# Altium PCB Project_PCB.PcbDoc
Units mm, origin at the board's own origin, x right, y up, seen from the top; angles counter-clockwise.
Board outline 100 x 100 mm, 2 copper layers (Top Layer, Bottom Layer); 40 components, 53 nets, 183 pads, 4 vias.
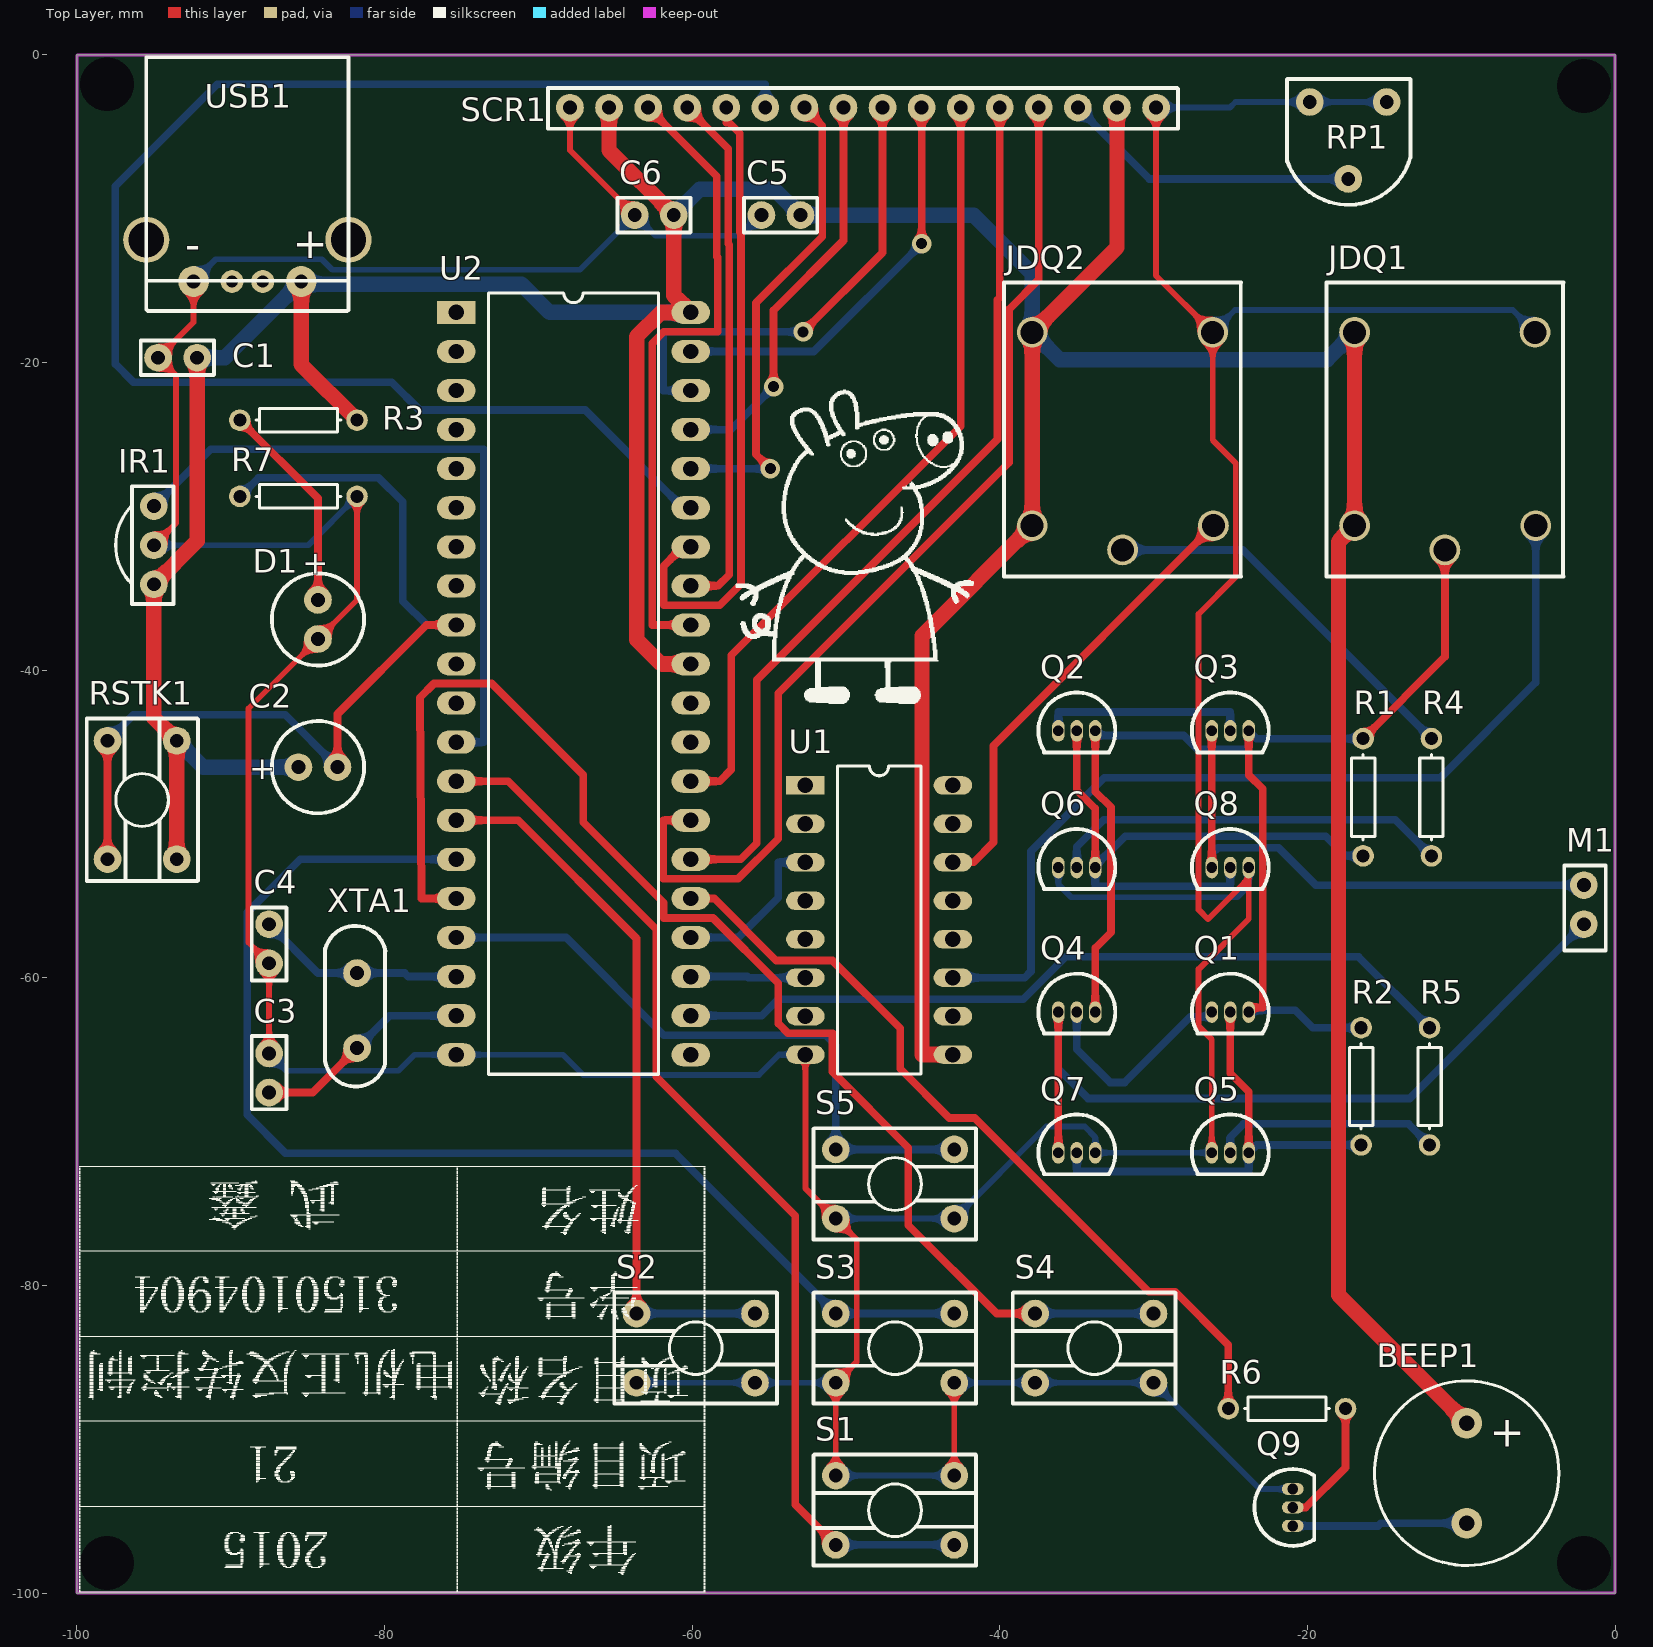
[diagram p0: Top Layer view]
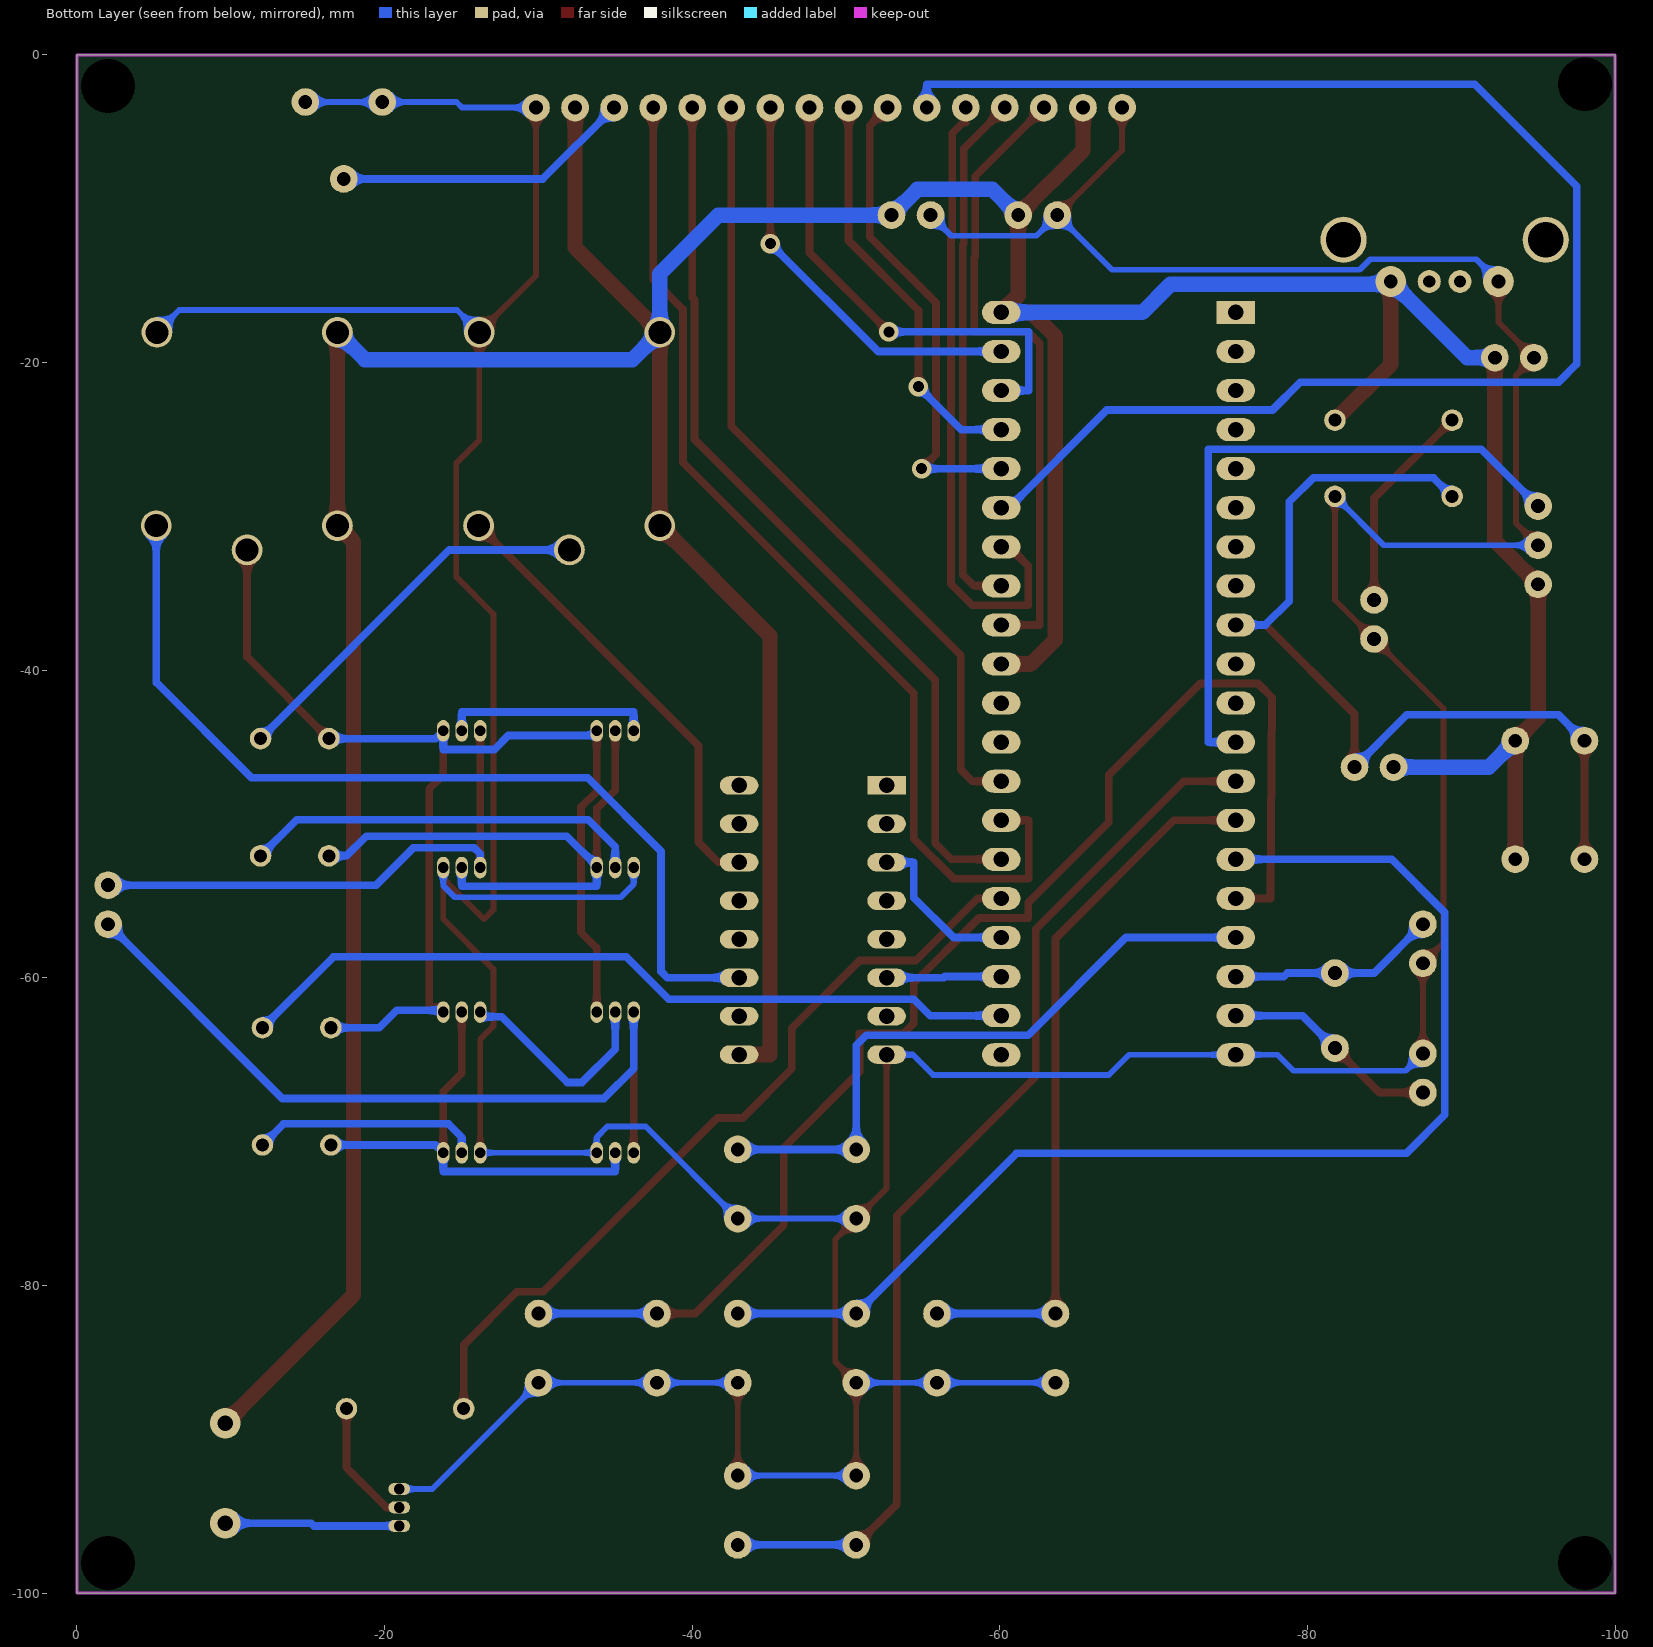
[diagram p1: Bottom Layer view, seen from below]

## Layer stack, top to bottom
Top Solder: solder mask 0.0102, Solder Resist, Dk 3.5
Top Layer: signal copper 0.0356
Dielectric 1: dielectric 0.32, FR-4, Dk 4.8
Bottom Layer: signal copper 0.0356
Bottom Solder: solder mask 0.0102, Solder Resist, Dk 3.5

## Board outline
-100,-100 0,-100 0,0 -100,0

## Design rules (kind name [scope] priority, off if disabled: settings)
Clearance [All] p1: gap=0.254
PolygonConnect [All] p1: connectstyle=Relief reliefconductorwidth=0.254 reliefentries=4 polygonreliefangle="90 Angle" airgapwidth=0.254
RoutingVias [All] p1: holewidth=0.711 width=1.27 viastyle="Through Hole" minholewidth=0.711 minwidth=1.27 maxholewidth=0.711 maxwidth=1.27
SolderMaskExpansion [All] p1: expansion=0.102
Width Width_gnd [InNet('GND')] p1: maxlimit=0.381 minlimit=0.381 preferedwidth=0.381
Width Width_vcc [InNet('VCC')] p2: maxlimit=1 minlimit=1 preferedwidth=1
Width [All] p3: maxlimit=0.5 minlimit=0.5 preferedwidth=0.5
30 further rules are at their usual default settings.

## Components (designator, comment, footprint, x,y, rotation, side; value= is the part's Value field where it differs from the comment)
BEEP1 "BEEP" BEEP -9.652,-92.202 r0 top
C1 "104" CAP -93.472,-19.685 r0 top
C2 "10UF" CAP-ELEC -84.328,-46.355 r0 top
C3 "30pF" CAP -87.503,-66.167 r270 top
C4 "30pF" CAP -87.503,-57.805 r90 top
C5 "104" CAP -54.249,-10.414 r0 top
C6 "104" CAP -62.484,-10.414 r0 top
D1 "LED" LED -84.378,-36.703 r270 top
IR1 "1x3" RAY -94.996,-34.417 r90 top
JDQ1 "3-2" RELAY -18.765,-32.004 r90 top
JDQ2 "3-2" RELAY -39.72,-32.004 r90 top
M1 "MOTOR" MOTOR -3.18,-52.827 r270 top
Q1 "9013" PINS-3 -25.019,-62.23 r0 top
Q2 "9013" PINS-3 -34.995,-43.942 r0 top
Q3 "9013" PINS-3 -25.019,-43.942 r0 top
Q4 "9013" PINS-3 -34.995,-62.23 r0 top
Q5 "9013" PINS-3 -25.019,-71.374 r0 top
Q6 "9013" PINS-3 -34.995,-52.832 r0 top
Q7 "9012" PINS-3 -34.995,-71.374 r0 top
Q8 "9012" PINS-3 -25.019,-52.832 r0 top
Q9 "9012" PINS-3 -20.955,-94.431 r90 top
R1 "1K" RES -17.018,-45.72 r270 top
R2 "1K" RES -17.145,-64.516 r270 top
R3 "1K" RES -83.058,-23.114 r180 top
R4 "1K" RES -12.573,-45.72 r270 top
R5 "1K" RES -12.7,-64.516 r270 top
R6 "100" RES -23.876,-88.646 r0 top
R7 "10K" RES -83.058,-28.067 r180 top
RP1 "5K" RES-ADJ -17.399,-5.588 r180 top
RSTK1 "按键" KEY-4 -95.758,-48.387 r90 top
S1 "按键" KEY-4 -46.863,-94.615 r180 top
S2 "按键" KEY-4 -59.817,-84.074 r180 top
S3 "按键" KEY-4 -46.863,-84.074 r180 top
S4 "按键" KEY-4 -33.909,-84.074 r180 top
S5 "按键" KEY-4 -46.863,-73.406 r180 top
SCR1 "LCD" LCD -67.945,-3.429 r180 top
U1 "ULN2003A" DIP16 -52.643,-47.491 r0 top
U2 "ST89C52" STC89C52 -67.437,-40.64 r0 top
USB1 "1x4" USB -95.508,-16.403 r0 top
XTA1 "12MHz" CRYSTAL -81.788,-64.57 r90 top

## Footprints (in the part's own frame and the unit in brackets; to place one, negate y for a bottom-side part, rotate by r counter-clockwise, add the part's x,y. Pads: shape width x height; smd on the part's side, far side on the other; paste and mask are expansions set on the pad)
BEEP [mm]
  round 2 hole 1: 1(0,3.25) 2(0,-3.25)
  silkscreen extent -6,-6 6,6
CAP [mm]
  round 1.8 hole 0.9: 1(-1.25,0) 2(1.29,0)
  silkscreen extent -2.37,-1.13 2.38,1.13
CAP-ELEC [mm]
  round 1.8 hole 0.9: 1(-1.27,0.05) 2(1.27,0.05)
  silkscreen extent -3,-2.95 3,3.05
CRYSTAL [mm]
  round 1.8 hole 0.9: 1(0,0) 2(4.88,0)
  silkscreen extent -2.5,-1.84 7.95,2.07
DIP16 [mm]
  rect 2.5x1.2 hole 1: 1(0,0)
  oval 2.5x1.2 hole 1: 2(0,-2.5) 3(0,-5) 4(0,-7.5) 5(0,-10) 6(0,-12.5) 7(0,-15) 8(0,-17.5) 9(9.59,-17.5) 10(9.59,-15) 11(9.59,-12.5) 12(9.59,-10) 13(9.59,-7.5) 14(9.59,-5) 15(9.59,-2.5) 16(9.59,0)
  silkscreen extent 2.09,-18.75 7.51,1.25
KEY-4 [mm]
  round 1.8 hole 0.9: 1(-3.9,-2.25) 1(3.8,-2.25) 2(-3.9,2.25) 2(3.8,2.25)
  silkscreen extent -5.33,-3.62 5.25,3.6
LCD [mm]
  round 1.8 hole 0.9: 1(-38.1,0) 2(-35.56,0) 3(-33.02,0) 4(-30.48,0) 5(-27.94,0) 6(-25.4,0) 7(-22.86,0) 8(-20.32,0) 9(-17.78,0) 10(-15.24,0) 11(-12.7,0) 12(-10.16,0) 13(-7.62,0) 14(-5.08,0) 15(-2.54,0) 16(0,0)
  silkscreen extent -39.52,-1.27 1.42,1.38
LED [mm]
  round 1.8 hole 0.9: 1(-1.27,0.05) 2(1.27,0.05)
  silkscreen extent -3,-2.95 3,3.05
MOTOR [mm]
  round 1.8 hole 0.9: 1(1.148,1.148) 2(3.688,1.148)
  silkscreen extent -0.13,-0.13 5.39,2.57
PINS-3 [mm]
  oval 0.8x1.4 hole 0.7: 1(-1.2,0) 2(0,0) 3(1.2,0)
  silkscreen extent -2.5,-1.4 2.5,2.5
RAY [mm]
  round 1.8 hole 0.9: 1(0,0) 2(2.54,0) 3(5.08,0)
  silkscreen extent -1.27,-1.27 6.37,2.48
RELAY [mm]
  round 2 hole 1.5: 1(13.97,-13.558) 2(13.97,-1.825) 3(1.397,-1.825) 4(-0.18,-7.7) 5(1.397,-13.605)
  silkscreen extent -1.91,-15.4 17.19,0
RES [mm]
  round 1.4 hole 0.85: 1(-1.27,0.635) 2(6.35,0.635)
  silkscreen extent -0.23,-0.13 5.31,1.4
RES-ADJ [mm]
  round 1.8 hole 0.9: 1(-2.55,-2.525) 2(-0.05,2.475) 3(2.45,-2.525)
  silkscreen extent -4.1,-4.02 3.93,4.15
STC89C52 [mm]
  rect 2.5x1.5 hole 1: 1(-7.9,23.9)
  oval 2.5x1.5 hole 1: 2(-7.9,21.36) 3(-7.9,18.82) 4(-7.9,16.28) 5(-7.9,13.74) 6(-7.9,11.2) 7(-7.9,8.66) 8(-7.9,6.12) 9(-7.9,3.58) 10(-7.9,1.04) 11(-7.9,-1.5) 12(-7.9,-4.04) 13(-7.9,-6.58) 14(-7.9,-9.12) 15(-7.9,-11.66) 16(-7.9,-14.2) 17(-7.9,-16.74) 18(-7.9,-19.28) 19(-7.9,-21.82) 20(-7.9,-24.36) 21(7.34,-24.36) 22(7.34,-21.82) 23(7.34,-19.28) 24(7.34,-16.74) 25(7.34,-14.2) 26(7.34,-11.66) 27(7.34,-9.12) 28(7.34,-6.58) 29(7.34,-4.04) 30(7.34,-1.5) 31(7.34,1.04) 32(7.34,3.58) 33(7.34,6.12) 34(7.34,8.66) 35(7.34,11.2) 36(7.34,13.74) 37(7.34,16.28) 38(7.34,18.82) 39(7.34,21.36) 40(7.34,23.9)
  silkscreen extent -5.82,-25.63 5.26,25.17
USB [mm]
  round 2 hole 0.9: 1(10.092,1.671) 4(3.092,1.671)
  round 1.5 hole 0.8: 2(7.592,1.671) 3(5.592,1.671)
  round 3 hole 2.3: 5(13.162,4.381) 6(0.022,4.381)
  silkscreen extent 0.02,-0.25 13.16,16.25

## Part data
BEEP1: library part 蜂鸣器
C1 C3 C4 C5 C6: library part 瓷片电容
C2: library part 电解电容
JDQ1 JDQ2: library part RELAY
Q1 Q2 Q3 Q4 Q5 Q6: library part NPN
Q7 Q8 Q9: library part PNP
R1 R2 R3 R4 R5 R6 R7: library part 电阻
RP1: library part 可调电阻
U2: library part STC89C52
XTA1: library part 晶振

## Free pads (board coordinates)
  round 1.524 hole 3.5: 0(-98.044,-98.044) 0(-98.044,-1.905) 0(-2.032,-98.044) 0(-2.032,-2.032)

## Via types
v1: diameter 1.27, hole 0.711, Top Layer to Bottom Layer, 4 vias

## Nets (pads, with @x,y where several pads share a name; then routed paths per layer and width w, separated by ;. In a path a pad name is that pad's centre, name@x,y a point inside that pad or via, vN(x,y) a via of type N, cw(c..) or ccw(c..) an arc to the next point about the centre after c; other vN are vias at no path point)
DIR: JDQ2.4 R4.1 | length 25.2
  Bottom Layer w0.5: JDQ2.4 -24.204,-32.184 R4.1
EGY: JDQ1.4 Q1.3 Q2.3 Q3.3 Q4.3 R1.1 R2.1 | length 80.6
  Top Layer w0.5: Q4.3 -33.795,-58.064 -32.766,-57.036 -32.766,-48.92 -33.795,-47.892 Q2.3 ; Q1.3 -23.819,-61.925 -22.911,-61.925 -22.911,-47.72 -23.819,-46.812 Q3.3 ; R1.1 -11.065,-39.132 JDQ1.4
  Bottom Layer w0.5: Q2.3 -33.795,-44.247 -28.042,-44.247 -27.127,-45.161 -23.819,-45.161 Q3.3 -23.311,-44.45 R1.1 ; Q1.3 -23.819,-62.116 -20.79,-62.116 -19.66,-63.246 R2.1
GND: C1.1 C3.1 C4.1 C5.1 C6.1 D1.2 IR1.2 JDQ1.1 JDQ2.1 Q5.1 Q6.1 Q7.3 Q8.3 Q9.3 R7.1 RP1.1 RP1.3 S1.1 S2.2 S3.2 S4.2 S5.2 SCR1.1 SCR1.16 U1.8 U2.20 USB1.4 | length 401.2
  Top Layer w0.381: IR1.2 -93.548,-30.429 -93.548,-20.859 C1.1 -92.416,-17.379 USB1.4 ; C3.1 C4.1 -88.849,-57.709 -88.849,-42.494 D1.2 -81.788,-35.433 R7.1 ; SCR1.16 -67.945,-6.203 C6.1 ; U1.8 -52.643,-73.676 -50.663,-75.656 -49.302,-77.017 -49.302,-84.963 -50.663,-86.324 S1.1@-50.663,-92.365 ; S1.1@-42.963,-92.365 S3.2@-42.963,-86.324 ; SCR1.1 -29.845,-14.351 JDQ2.1 -26.162,-25.045 -24.664,-26.543 -24.664,-33.934 -27.077,-36.347 -27.077,-55.575 -26.467,-56.185 -23.819,-53.537 ; Q5.1 -26.219,-64.002 -27.077,-63.144 -27.077,-59.436 -23.819,-56.178 -23.819,-53.537 ; Q8.3 -23.819,-53.537
  Bottom Layer w0.381: IR1.2 -84.963,-31.877 R7.1 ; USB1.4 -90.968,-13.284 -84.074,-13.284 -83.392,-13.967 -67.287,-13.967 C6.1 -62.388,-11.76 -56.845,-11.76 C5.1 ; C3.1 -86.38,-66.04 -79.096,-66.04 -78.056,-65 U2.20 -68.401,-65 -67.082,-66.319 -55.667,-66.319 -54.339,-64.991 U1.8 ; S2.2@-63.617,-86.324 -55.917,-86.324 S3.2@-50.663,-86.324 ; S1.1@-50.663,-92.365 S1.1@-42.963,-92.365 ; S5.2@-50.663,-75.656 -42.963,-75.656 -36.979,-69.672 -34.481,-69.672 -33.795,-70.358 Q7.3 Q5.1 ; S3.2@-42.963,-86.324 -37.709,-86.324 -30.009,-86.324 -23.102,-93.231 Q9.3 ; Q6.1 -36.195,-53.924 -35.357,-54.762 -24.562,-54.762 -23.819,-54.019 Q8.3 ; SCR1.1 -25.045,-3.429 -24.679,-3.063 RP1.3 RP1.1 ; JDQ2.1 -24.714,-16.586 -6.655,-16.586 JDQ1.1
NetBEEP1_2: BEEP1.2 Q9.1 | length 11.4
  Bottom Layer w0.5: Q9.1 -15.418,-95.631 -15.239,-95.452 BEEP1.2
NetD1_1: D1.1 R3.2 | length 13.8
  Top Layer w0.5: R3.2 -84.328,-28.829 D1.1
NetM1_1: M1.1 Q3.1 Q8.1 | length 35.1
  Top Layer w0.5: Q8.1 Q3.1
  Bottom Layer w0.5: Q8.1 -26.219,-51.943 -25.817,-51.541 -21.881,-51.541 -19.447,-53.975 M1.1
NetM1_2: M1.2 Q4.1 Q7.1 | length 52.5
  Top Layer w0.5: Q7.1 Q4.1
  Bottom Layer w0.5: Q4.1 -36.195,-65.913 -34.265,-67.843 -13.36,-67.843 M1.2
NetQ1_2: Q1.2 Q5.3 Q7.2 R2.2 | length 30.8
  Top Layer w0.5: Q1.2 -25.019,-66.212 -23.819,-67.412 Q5.3
  Bottom Layer w0.5: Q7.2 -34.995,-72.593 -23.819,-72.593 Q5.3 -23.311,-70.866 R2.2
NetQ1_3: Q1.1 Q4.2 | length 14.2
  Bottom Layer w0.5: Q4.2 -34.995,-64.643 -32.836,-66.802 -31.877,-66.802 -27.61,-62.535 -26.219,-62.535 Q1.1
NetQ2_2: Q2.2 Q6.3 Q8.2 R1.2 | length 39.5
  Top Layer w0.5: Q2.2 -34.995,-47.797 -33.795,-48.997 Q6.3
  Bottom Layer w0.5: Q8.2 -25.019,-54.051 -33.795,-54.051 Q6.3 -33.795,-52.73 -31.852,-50.787 -18.809,-50.787 -17.526,-52.07 R1.2
NetQ2_3: Q2.1 Q3.2 | length 13.6
  Bottom Layer w0.5: Q2.1 -36.195,-42.723 -25.019,-42.723 Q3.2
NetQ5_2: Q5.2 R5.2 | length 14.9
  Bottom Layer w0.5: Q5.2 -25.019,-70.358 -24.155,-69.494 -13.437,-69.494 R5.2
NetQ6_2: Q6.2 R4.2 | length 26.1
  Bottom Layer w0.5: Q6.2 -34.995,-51.486 -33.233,-49.724 -14.284,-49.724 R4.2
NetQ9_2: Q9.2 R6.2 | length 8.3
  Top Layer w0.5: Q9.2 -20.117,-94.431 -17.526,-91.84 R6.2
NetRP1_2: RP1.2 SCR1.3 | length 19.5
  Bottom Layer w0.5: SCR1.3 -30.291,-8.063 RP1.2
P00: SCR1.7 U2.39 | length 26.8
  Top Layer w0.5: v1(-45.085,-12.268) SCR1.7
  Bottom Layer w0.5: U2.39 -52.097,-19.28 v1(-45.085,-12.268)
P01: SCR1.8 U2.38 | length 31.4
  Top Layer w0.5: v1(-52.781,-18.009) -47.625,-12.852 SCR1.8
  Bottom Layer w0.5: U2.38 -61.875,-21.82 -61.875,-18.009 v1(-52.781,-18.009)
P02: SCR1.9 U2.37 | length 26.6
  Top Layer w0.5: v1(-54.71,-21.565) -54.71,-16.61 -50.165,-12.065 SCR1.9
  Bottom Layer w0.5: U2.37 -57.506,-24.36 v1(-54.71,-21.565)
P03: SCR1.10 U2.36 | length 31.3
  Top Layer w0.5: v1(-54.915,-26.9) -55.855,-25.96 -55.855,-16.129 -51.537,-11.811 -51.537,-4.597 SCR1.10
  Bottom Layer w0.5: U2.36 v1(-54.915,-26.9)
P04: SCR1.11 U2.35 | length 99.4
  Bottom Layer w0.5: U2.35 -60.605,-29.44 -66.956,-23.089 -77.724,-23.089 -79.528,-21.285 -96.317,-21.285 -97.511,-20.091 -97.511,-8.534 -90.881,-1.905 -55.245,-1.905 SCR1.11
P05: SCR1.12 U2.34 | length 41.9
  Top Layer w0.5: U2.34 -60.605,-31.98 -61.851,-33.227 -61.851,-35.774 -58.217,-35.774 -56.82,-34.377 -56.82,-11.608 -56.903,-11.525 -56.903,-5.099 -57.582,-4.42 -57.785,-4.42 SCR1.12
P06: SCR1.13 U2.33 | length 34.3
  Top Layer w0.5: SCR1.13 -57.657,-6.097 -57.657,-12.286 -57.589,-12.354 -57.589,-33.79 -58.319,-34.52 U2.33
P07: SCR1.14 U2.32 | length 41.8
  Top Layer w0.5: SCR1.14 -58.411,-7.883 -58.411,-13.108 -58.343,-13.176 -58.343,-18.009 -61.851,-18.009 -62.605,-18.763 -62.605,-37.06 U2.32
P10: U2.1
P11: U2.2
P12: U2.3
P13: U2.4
P14: U2.5
P15: U2.6
P16: U2.7
P17: U2.8
P20: U2.21
P21: R5.1 U2.22 | length 51.5
  Bottom Layer w0.5: U2.22 -55.47,-62.46 -54.397,-61.387 -38.476,-61.387 -35.713,-58.623 -16.688,-58.623 R5.1
P22: U1.6 U2.23 | length 7.5
  Bottom Layer w0.5: U2.23 -56.414,-59.92 -56.343,-59.991 U1.6
P23: U1.3 U2.24 | length 10.8
  Bottom Layer w0.5: U2.24 -56.998,-57.38 -54.407,-54.789 -54.407,-52.491 U1.3
P24: R6.1 U2.25 | length 52.7
  Top Layer w0.5: U2.25 -58.571,-54.84 -54.534,-58.877 -50.876,-58.877 -46.482,-63.271 -46.482,-65.913 -43.282,-69.113 -41.631,-69.113 -30.328,-80.416 -28.601,-80.416 -25.146,-83.871 R6.1
P25: SCR1.5 U2.26 | length 59.1
  Top Layer w0.5: U2.26 -56.845,-52.3 -55.803,-51.257 -55.803,-40.639 -40.153,-24.989 -40.153,-15.924 -40.005,-15.776 SCR1.5
P26: SCR1.4 U2.27 | length 68.7
  Top Layer w0.5: U2.27 -61.875,-49.76 -61.875,-53.569 -57.023,-53.569 -54.407,-50.952 -54.407,-41.504 -39.399,-26.496 -39.399,-16.535 -37.465,-14.601 SCR1.4
P27: SCR1.6 U2.28 | length 52.2
  Top Layer w0.5: U2.28 -58.217,-47.22 -57.455,-46.458 -57.455,-39.04 -42.545,-24.13 SCR1.6
P32: IR1.3 U2.12 | length 43.8
  Bottom Layer w0.5: IR1.3 -91.288,-25.629 -73.559,-25.629 -73.559,-44.68 U2.12
P33: S1.2 U2.13 | length 69.5
  Top Layer w0.5: U2.13 -71.96,-47.22 -62.332,-56.848 -62.332,-66.421 -53.289,-75.463 -53.289,-94.239 S1.2@-50.663,-96.865
  Bottom Layer w0.5: S1.2@-50.663,-96.865 S1.2@-42.963,-96.865
P34: S2.1 U2.14 | length 47
  Top Layer w0.5: U2.14 -71.298,-49.76 -63.617,-57.441 S2.1@-63.617,-81.824
  Bottom Layer w0.5: S2.1@-63.617,-81.824 S2.1@-55.917,-81.824
P35: S3.1 U2.15 | length 79.5
  Bottom Layer w0.5: U2.15 -85.473,-52.3 -88.926,-55.753 -88.926,-68.91 -86.436,-71.399 -61.088,-71.399 -50.663,-81.824 S3.1@-42.963,-81.824
P36: S4.1 U2.16 | length 88.7
  Top Layer w0.5: U2.16 -77.597,-54.84 -77.699,-41.783 -76.784,-40.869 -73.025,-40.869 -67.082,-46.812 -67.082,-49.886 -61.849,-55.118 -61.849,-56.109 -58.649,-56.109 -54.407,-60.35 -54.407,-62.967 -53.772,-63.602 -50.876,-63.602 -50.876,-66.116 -45.949,-71.044 -45.949,-76.073 -40.198,-81.824 S4.1@-37.709,-81.824
  Bottom Layer w0.5: S4.1@-37.709,-81.824 S4.1@-30.009,-81.824
P37: S5.1 U2.17 | length 42.1
  Bottom Layer w0.5: U2.17 -68.198,-57.38 -61.849,-63.729 -51.308,-63.729 -50.663,-64.374 -50.663,-71.156 S5.1@-42.963,-71.156
RST: C2.2 R7.2 RSTK1.2 U2.9 | length 60.7
  Top Layer w0.5: RSTK1.2@-98.008,-52.287 RSTK1.2@-98.008,-44.587 ; C2.2 -83.058,-42.851 -77.267,-37.06 U2.9
  Bottom Layer w0.5: RSTK1.2@-98.008,-44.587 -96.322,-42.901 -86.462,-42.901 C2.2 ; R7.2 -88.189,-27.483 -80.391,-27.483 -78.816,-29.058 -78.816,-35.511 -77.267,-37.06 U2.9
RXD: U2.10
TMP1: JDQ1.5 U1.11 | length 60.6
  Bottom Layer w0.5: U1.11 -38.38,-59.991 -37.973,-59.585 -37.973,-51.765 -33.198,-46.99 -11.354,-46.99 -5.16,-40.796 JDQ1.5
TMP2: JDQ2.5 U1.14 | length 29.7
  Top Layer w0.5: U1.14 -41.707,-52.491 -40.412,-51.196 -40.412,-44.904 JDQ2.5
TXD: U2.11
VCC: BEEP1.1 C1.2 C2.1 C5.2 C6.2 IR1.1 JDQ1.2 JDQ1.3 JDQ2.2 JDQ2.3 R3.1 RSTK1.1 SCR1.2 SCR1.15 U1.9 U2.31 U2.40 USB1.1 | length 328.2
  Top Layer w1: RSTK1.1@-93.508,-52.287 -93.508,-44.587 -94.996,-43.099 IR1.1 -92.182,-31.603 C1.2 ; USB1.1 -85.416,-20.121 R3.1 ; SCR1.15 -65.405,-6.203 C6.2 -61.194,-15.643 U2.40 -62.027,-16.74 -63.609,-18.322 -63.609,-38.018 -62.027,-39.6 U2.31 ; U1.9 -45.06,-64.991 -45.06,-37.772 JDQ2.3 JDQ2.2 -32.385,-12.524 SCR1.2 ; JDQ1.2 JDQ1.3 -17.983,-31.65 -17.983,-80.621 BEEP1.1
  Bottom Layer w1: RSTK1.1@-93.508,-44.587 -91.79,-46.305 C2.1 ; C1.2 -90.369,-19.685 USB1.1 -85.237,-14.911 -71.094,-14.911 -69.265,-16.74 U2.40 ; C6.2 -59.518,-8.738 -54.635,-8.738 C5.2 -41.707,-10.414 -37.895,-14.226 JDQ2.2 -36.117,-19.812 -18.718,-19.812 JDQ1.2
XT1: C3.2 U2.19 XTA1.1 | length 14.2
  Top Layer w0.5: C3.2 -84.675,-67.457 XTA1.1
  Bottom Layer w0.5: XTA1.1 -79.678,-62.46 U2.19
XT2: C4.2 U2.18 XTA1.2 | length 13.6
  Bottom Layer w0.5: C4.2 -84.328,-59.69 XTA1.2 -78.689,-59.69 -78.459,-59.92 U2.18
pads on no net: U1.1 U1.2 U1.4 U1.5 U1.7 U1.10 U1.12 U1.13 U1.15 U1.16 U2.29 U2.30 USB1.2 USB1.3 USB1.5 USB1.6

## Keep-outs
Keep-Out Layer:
  the board outline again, w0.2

## Silkscreen, mask and mechanical layers (free items; w line width, h text height)
Top Overlay:
  drawing of 5611 lines, arcs and shapes, not listed

## Text inside footprints (layer, text, board x,y; h text height)
BEEP1: Top Overlay "+" at -8.153,-90.475 h2
C2: Top Overlay "+" at -88.803,-47.105 h1.5
D1: Top Overlay "+" at -85.128,-32.228 h1.5 r270
USB1: Top Overlay "-" at -92.941,-13.332 h2; Top Overlay "+" at -85.966,-13.207 h2